# EAGLE board LJPCB_01 (EAGLE 8.0.2)
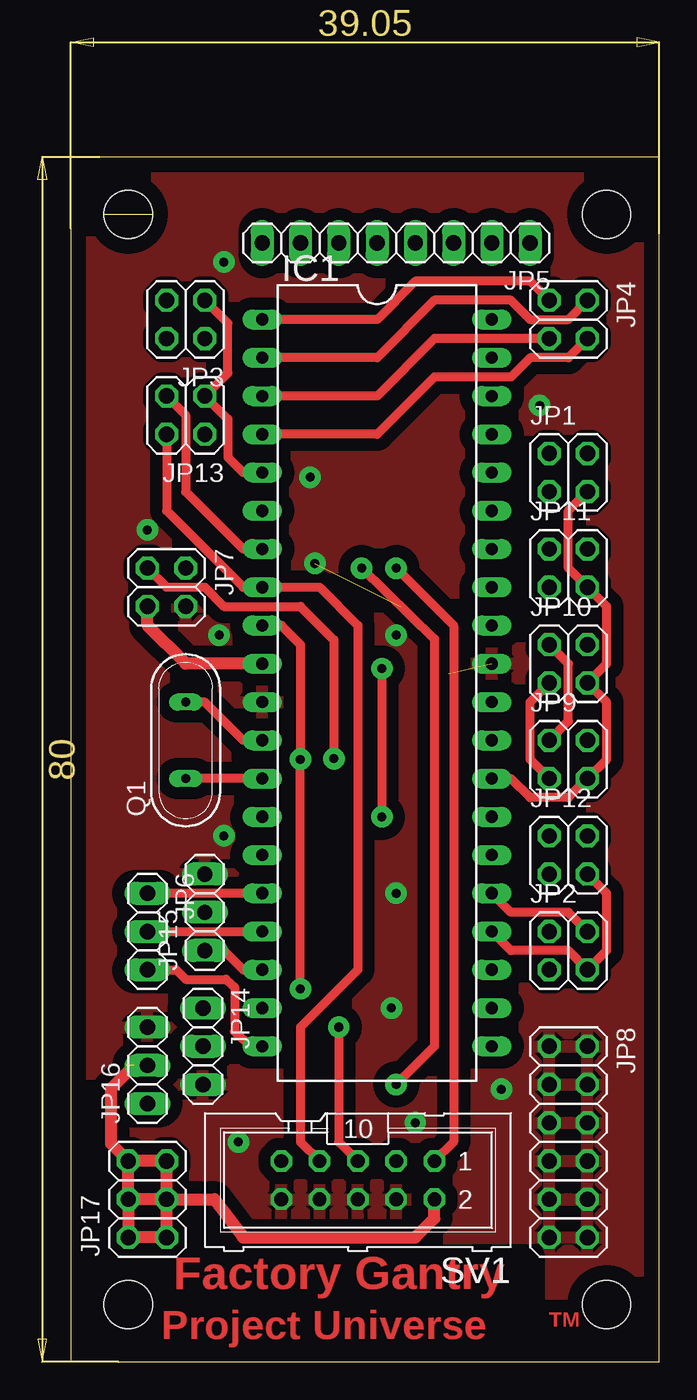
[diagram p0: board, top side]
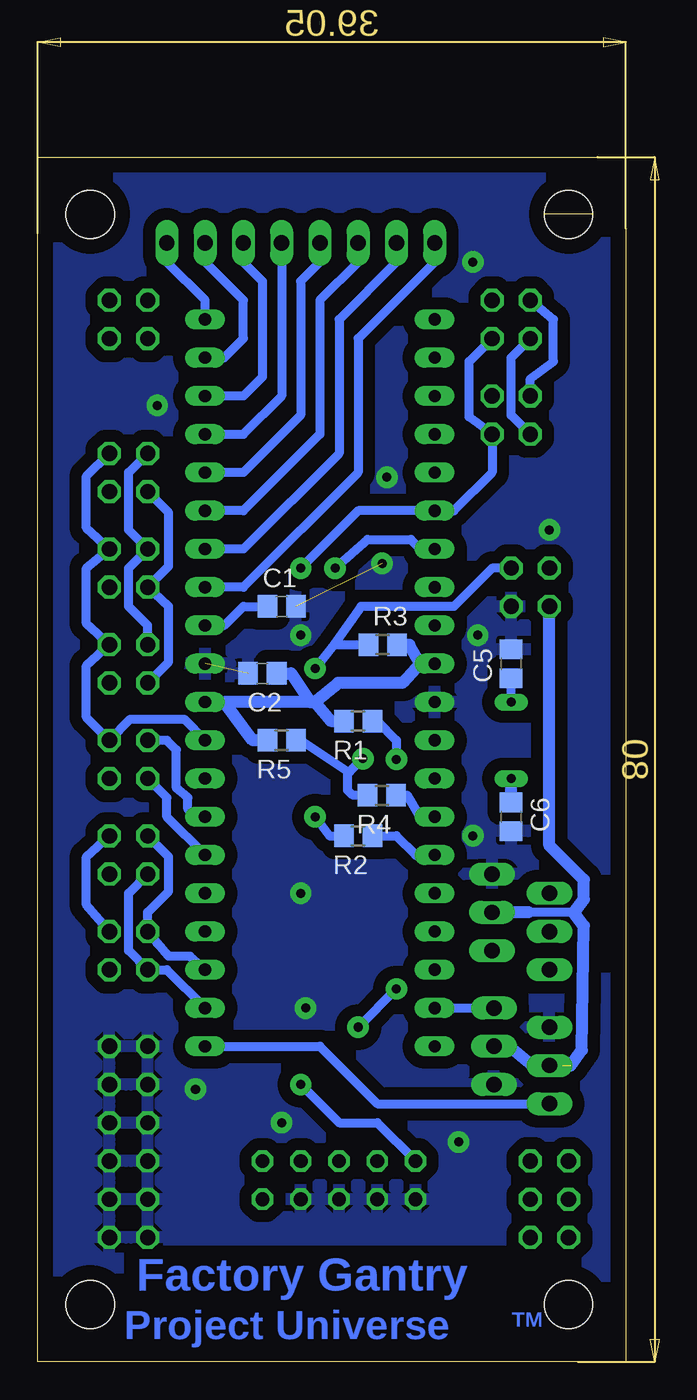
[diagram p1: board, bottom side, seen from below]

Size 39.04 x 80 mm. Coordinates in mm from the lower left corner, seen from the top.
Outline: 0,0 39.04,0 39.04,80 0,80 0,0
Copper layers (1*16): Top 0.035mm / dielectric 1.5mm / Bottom 0.035mm
Design rules "default *": minimum track width 0mil, minimum drill 0mil, track to track 8mil, track to pad 8mil, pad to pad 8mil, via to via 8mil, smd to smd 8mil, copper to edge 40mil, drill to drill 8mil, minimum pad ring 10mil, minimum via ring 8mil, stop-mask expansion 0mil, vias tented up to drill 0mil, thermal gap 10mil
Holes 3.2 mm at 3.81,76.2 35.56,76.2 3.81,3.81 35.56,3.81

## Footprints (pad centres in the part's own frame; a part is rotated, then mirrored left to right if it is on the bottom)
C0805 = smd 1.3 x 1.5: 1 -0.95,0; 2 0.95,0
DIL40 = drill 0.813 long: 1 -24.13,-7.62; 2 -21.59,-7.62; 3 -19.05,-7.62; 4 -16.51,-7.62; 5 -13.97,-7.62; 6 -11.43,-7.62; 7 -8.89,-7.62; 8 -6.35,-7.62; 9 -3.81,-7.62; 10 -1.27,-7.62; 11 1.27,-7.62; 12 3.81,-7.62; 13 6.35,-7.62; 14 8.89,-7.62; 15 11.43,-7.62; 16 13.97,-7.62; 17 16.51,-7.62; 18 19.05,-7.62; 19 21.59,-7.62; 20 24.13,-7.62; 21 24.13,7.62; 22 21.59,7.62; 23 19.05,7.62; 24 16.51,7.62; 25 13.97,7.62; 26 11.43,7.62; 27 8.89,7.62; 28 6.35,7.62; 29 3.81,7.62; 30 1.27,7.62; 31 -1.27,7.62; 32 -3.81,7.62; 33 -6.35,7.62; 34 -8.89,7.62; 35 -11.43,7.62; 36 -13.97,7.62; 37 -16.51,7.62; 38 -19.05,7.62; 39 -21.59,7.62; 40 -24.13,7.62
2X02 = drill 1.016 octagon: 1 -1.27,-1.27; 2 -1.27,1.27; 3 1.27,-1.27; 4 1.27,1.27
1X08 = drill 1.016 long: 1 -8.89,0; 2 -6.35,0; 3 -3.81,0; 4 -1.27,0; 5 1.27,0; 6 3.81,0; 7 6.35,0; 8 8.89,0
1X03 = drill 1.016 long: 1 -2.54,0; 2 0,0; 3 2.54,0
2X06 = drill 1.016 octagon: 1 -6.35,-1.27; 2 -6.35,1.27; 3 -3.81,-1.27; 4 -3.81,1.27; 5 -1.27,-1.27; 6 -1.27,1.27; 7 1.27,-1.27; 8 1.27,1.27; 9 3.81,-1.27; 10 3.81,1.27; 11 6.35,-1.27; 12 6.35,1.27
2X03 = drill 1.016 octagon: 1 -2.54,-1.27; 2 -2.54,1.27; 3 0,-1.27; 4 0,1.27; 5 2.54,-1.27; 6 2.54,1.27
QS = drill 0.61 long: 1 -2.54,0; 2 2.54,0
R0805 = smd 1.3 x 1.5: 1 -0.95,0; 2 0.95,0
ML10 = drill 0.914 octagon: 1 -5.08,-1.27; 2 -5.08,1.27; 3 -2.54,-1.27; 4 -2.54,1.27; 5 0,-1.27; 6 0,1.27; 7 2.54,-1.27; 8 2.54,1.27; 9 5.08,-1.27; 10 5.08,1.27

## Placement (x,y rotation side)
C1  100nF  [C0805]  22.86,50.16 0 bottom
C2  100nF  [C0805]  24.13,45.72 180 bottom
C5  22pF  [C0805]  7.62,46.36 90 bottom
C6  22pF  [C0805]  7.62,36.2 270 bottom
IC1  MEGA16-P  [DIL40]  20.32,45.09 270 top
JP1  [2X02]  33.02,59.05 0 top
JP2  [2X02]  33.02,27.3 0 top
JP3  [2X02]  7.62,69.22 180 top
JP4  [2X02]  33.02,69.22 270 top
JP5  [1X08]  21.59,74.3 180 top
JP6  [1X03]  5.08,28.57 270 top
JP7  [2X02]  6.35,51.44 270 top
JP8  [2X06]  33.02,14.61 270 top
JP9  [2X02]  33.02,40.01 0 top
JP10  [2X02]  33.02,46.36 0 top
JP11  [2X02]  33.02,52.71 0 top
JP12  [2X02]  33.02,33.66 0 top
JP13  [2X02]  7.62,62.87 180 top
JP14  [1X03]  8.76,20.95 270 top
JP15  [1X03]  8.89,29.84 90 top
JP16  [1X03]  5.08,19.68 90 top
JP17  [2X03]  5.08,10.79 90 top
Q1  [QS]  7.62,41.28 90 top
R1  10k  [R0805]  17.78,42.55 180 bottom
R2  220  [R0805]  17.78,34.92 180 bottom
R3  10k  [R0805]  16.15,47.62 0 bottom
R4  220  [R0805]  16.21,37.62 180 bottom
R5  10k  [R0805]  22.86,41.28 180 bottom
SV1  [ML10]  19.05,12.07 180 top

## Library data of the parts
C1 C2 C5 C6 R1-R5 = resistor
IC1 = atmel; MPN: ATMEGA16-16PU; OC_FARNELL: 9171142; OC_NEWARK: 01M6885
JP1-JP17 = pinhead
Q1 = special
SV1 = con-ml; OC_FARNELL: unknown; OC_NEWARK: unknown

## Nets
ADC0: IC1.40 JP5.1
ADC1: IC1.39 JP5.2
ADC2: IC1.38 JP5.3
ADC3: IC1.37 JP5.4
ADC4: IC1.36 JP5.5
ADC5: IC1.35 JP5.6
ADC6: IC1.34 JP5.7
ADC7: IC1.33 JP5.8
GND: C1.2 C2.2 C5.2 C6.2 IC1.11 IC1.31 JP7.4 JP8.1 JP8.2 JP8.3 JP8.4 JP8.5 JP8.6 JP8.7 JP8.8 JP8.9 JP8.10 JP8.11 JP8.12 JP14.3 JP15.3 JP16.3 SV1.4 SV1.6 SV1.8 SV1.10
ICP: IC1.20 JP6.3
INT0: IC1.16 JP6.1
INT1: IC1.17 JP6.2
M0A: IC1.1 JP4.1
M0B: IC1.2 JP4.2
M0C: IC1.3 JP4.3
M0D: IC1.4 JP4.4
M1A: IC1.5 JP3.1 JP13.1
M1B: IC1.6 JP3.2 JP13.2 SV1.1
M1C: IC1.7 JP3.3 JP13.3 SV1.9
M1D: IC1.8 JP3.4 JP13.4 SV1.7
M2A: IC1.22 JP2.1 JP12.1
M2B: IC1.23 JP2.2 JP12.2
M2C: IC1.24 JP2.3 JP12.3
M2D: IC1.25 JP2.4 JP12.4
M3A: IC1.26 JP1.1 JP9.1 JP10.1 JP11.1
M3B: IC1.27 JP1.2 JP9.2 JP10.2 JP11.2
M3C: IC1.28 JP1.3 JP9.3 JP10.3 JP11.3
M3D: IC1.29 JP1.4 JP9.4 JP10.4 JP11.4
N$1: JP7.1 R4.2 R5.1
N$2: JP7.2 R2.2 R3.1
N$3: C1.1 IC1.32
OC1A: IC1.19 JP14.1
OC1B: IC1.18 JP15.1
OC2: IC1.21 JP16.1
RST: IC1.9 R1.1 SV1.5
RXD: IC1.14 R4.1
TXD: IC1.15 R2.1
VCC: C2.1 IC1.10 IC1.30 JP7.3 JP14.2 JP15.2 JP16.2 JP17.1 JP17.2 JP17.3 JP17.4 JP17.5 JP17.6 R1.2 R3.2 R5.2 SV1.2
XTAL1: C6.1 IC1.13 Q1.1
XTAL2: C5.1 IC1.12 Q1.2

## Tracks (layer width: path | path; a pad name or v marks a point on that pad's centre or on a via)
ADC0
  Bottom 0.61: IC1.40 27.94,70.48 30.48,73.03 JP5.1
ADC1
  Bottom 0.61: JP5.2 27.94,73.03 25.4,70.48 25.4,67.95 26.67,66.67 IC1.39
ADC2
  Bottom 0.61: IC1.38 25.4,64.14 24.13,65.41 24.13,71.75 25.4,73.03 JP5.3
ADC3
  Bottom 0.61: IC1.37 25.4,61.59 22.86,64.14 JP5.4
ADC4
  Bottom 0.61: IC1.36 25.4,59.05 21.59,62.87 21.59,71.75 20.32,73.03 JP5.5
ADC5
  Bottom 0.61: JP5.6 17.78,73.03 20.32,70.48 20.32,61.59 25.4,56.52 IC1.35
ADC6
  Bottom 0.61: JP5.7 15.24,73.03 19.05,69.22 19.05,60.33 25.4,53.98 IC1.34
ADC7
  Bottom 0.61: JP5.8 12.7,73.03 17.78,67.95 17.78,59.05 25.4,51.44 IC1.33
GND  (via drill 0.6 pad 1.42)  (2 unrouted)
  other vias: 21.59,48.26 22.86,15.88 10.16,34.92 9.84,48.26 5.08,55.25 15.88,58.74 16.19,53.02 10.16,73.03 31.12,63.5 28.58,18.1 11.11,14.61 21.27,23.49 21.59,31.11
  pour Bottom (isolate 0.813): 0,80.01 38.73,80.01 38.73,0 0,0
  pour Top (isolate 0.813): 0.03,80.01 38.73,80.01 38.73,0 0.03,0
ICP
  Top 0.61: JP6.3 6.99,26.04 7.62,25.4 10.29,25.4 10.87,24.87 10.87,21.92 11.94,20.95 IC1.20
INT0
  Top 0.61: IC1.16 JP6.1
INT1
  Top 0.61: JP6.2 IC1.17
M0A
  Top 0.61: JP4.1 30.48,71.75 22.86,71.75 20.32,69.22 IC1.1
M0B
  Top 0.61: JP4.2 33.02,69.22 30.48,69.22 29.21,70.48 24.13,70.48 20.32,66.67 IC1.2
M0C
  Top 0.61: JP4.3 24.13,67.95 20.32,64.14 IC1.3
M0D
  Top 0.61: JP4.4 33.02,66.67 30.48,66.67 29.21,65.41 24.13,65.41 20.32,61.59 IC1.4
M1A
  Top 0.61: JP3.1 10.41,68.96 10.41,65.66 JP13.1 10.41,62.61 10.41,60.07 11.43,59.05 IC1.5
M1B  (via drill 0.6 pad 1.42)
  Top 0.61: v21.59,52.71 25.4,48.9 25.4,14.61 SV1.1
  Bottom 0.61: JP3.2 10.41,66.42 10.41,62.74 JP13.2 8.89,59.05 11.43,56.52 IC1.6 17.78,56.52 v21.59,52.71
M1C  (via drill 0.6 pad 1.42)
  Top 0.61: JP13.3 7.62,62.87 7.62,57.79 11.43,53.98 IC1.7 | v19.3,52.71 24.13,48.01 24.13,20.95 v21.59,18.41
  Bottom 0.61: JP13.3 6.35,65.28 4.83,66.42 4.83,69.22 JP3.3 | v19.3,52.71 17.14,54.61 14.29,54.61 13.65,53.98 IC1.7 | v21.59,18.41 19.05,15.88 16.51,15.88 SV1.9
M1D
  Top 0.61: JP13.4 6.35,56.52 11.43,51.44 IC1.8 16.51,51.44 19.05,48.9 19.05,26.04 15.24,22.22 15.24,14.61 SV1.7
  Bottom 0.61: JP13.4 7.62,62.87 7.62,66.67 JP3.4
M2A
  Bottom 0.61: IC1.22 30.48,26.04 JP2.1 33.02,27.3 33.02,31.11 JP12.1
M2B
  Bottom 0.61: IC1.23 28.96,26.92 30.35,26.92 31.12,27.81 JP2.2 31.75,29.84 30.35,31.24 30.35,33.53 JP12.2
M2C
  Top 0.61: IC1.24 29.21,27.3 33.02,27.3 JP2.3 35.56,27.3 35.56,31.11 JP12.3
M2D
  Top 0.61: JP2.4 33.02,29.84 29.21,29.84 IC1.25
  Bottom 0.61: JP2.4 35.81,30.35 35.81,33.53 JP12.4
M3A
  Top 0.61: JP9.1 30.48,40.01 30.48,43.82 JP10.1
  Bottom 0.61: IC1.26 30.48,36.2 30.48,37.47 JP9.1 | JP10.1 30.35,46.48 30.35,50.16 JP11.1 30.35,52.83 30.35,56.39 JP1.1
M3B
  Top 0.61: JP9.2 33.02,42.55 33.02,46.36 JP10.2
  Bottom 0.61: IC1.27 28.58,36.2 29.08,36.7 29.08,37.47 29.85,38.1 29.85,40.64 30.48,41.28 JP9.2 | JP10.2 31.75,48.9 33.02,50.16 33.02,52.71 JP11.2 33.02,55.25 33.02,59.05 JP1.2
M3C
  Top 0.61: JP1.3 33.02,56.52 33.02,52.71 JP11.3 35.56,50.16 35.56,46.36 JP10.3 35.56,43.82 35.56,40.01 JP9.3 33.02,37.47 30.48,37.47 29.21,38.73 IC1.28
M3D
  Bottom 0.61: JP1.4 35.81,58.8 35.81,55.37 JP11.4 35.81,52.71 35.81,49.02 JP10.4 35.81,46.23 35.81,42.8 JP9.4 32.89,42.67 29.34,42.67 IC1.29
N$1  (via drill 0.6 pad 1.42)
  Top 0.61: JP7.1 6.35,51.44 8.89,51.44 10.16,50.16 15.24,50.16 17.46,47.94 v17.46,40.06
  Bottom 0.61: R5.1 21.59,41.28 18.49,39.19 | 18.49,39.19 18.49,37.97 18.16,37.64 17.18,37.64 R4.2 | 18.49,39.19 18.33,39.19 v17.46,40.06
N$2  (via drill 0.6 pad 1.42)
  Top 0.61: v20.64,46.04 v20.64,36.2
  Bottom 0.61: JP7.2 8.89,52.71 11.43,50.16 17.58,50.16 19.36,47.64 | v20.64,36.2 19.69,34.92 R2.2 | 19.36,47.64 R3.1 | 19.36,47.64 v20.64,46.04
N$3
  Bottom 0.61: IC1.32 26.67,48.9 25.4,50.16 C1.1
OC1A
  Bottom 0.61: IC1.19 JP14.1
OC1B
  Top 0.61: JP15.1 10.16,27.3 11.43,26.04 IC1.18
OC2
  Bottom 0.61: IC1.21 20.32,20.95 16.51,17.14 JP16.1
RST  (via drill 0.6 pad 1.42)
  Top 0.61: IC1.9 13.97,48.9 15.24,47.62 v15.24,40.01 v15.24,24.76 | v17.78,22.22 17.78,14.61 SV1.5
  Bottom 0.61: v17.78,22.22 v15.24,24.76 | R1.1 16.51,42.55 15.24,41.28 v15.24,40.01
RXD
  Bottom 0.61: R4.1 14.53,37.62 13.69,36.22 12.72,36.22 IC1.14
TXD
  Bottom 0.61: R2.1 15.24,34.92 13.97,33.66 IC1.15
VCC  (1 unrouted)
  Top 0.813: IC1.10 7.62,46.36 5.08,48.9 JP7.3 | SV1.2 24.13,9.53 22.86,8.26 11.43,8.26 9.53,10.79 JP17.3 | JP17.4 JP17.2 JP17.1 JP17.3 | JP17.5 JP17.6 | JP17.6 2.67,14.48 2.67,18.16 4.19,19.68 JP16.2 | JP17.4 JP17.6 | JP17.3 JP17.5 | JP17.5 6.35,13.08 | JP17.3 JP17.4
  Bottom 0.61: 3.48,29.84 6.48,29.84
  Bottom 0.813: IC1.30 26.67,43.82 | C2.1 22.23,45.72 20.96,43.82 | R5.2 24.77,41.28 26.67,43.82 | 13.66,46.36 14.83,45.09 19.1,45.09 20.68,43.82 | 20.68,43.82 19.61,42.56 R1.2 | 20.68,43.82 20.96,43.82 | 20.96,43.82 26.67,43.82 | 13.66,46.36 IC1.10 | 13.66,46.36 14.38,47.61 R3.2 | JP7.3 5.08,34.29 2.79,32 2.79,30.73 3.48,29.84 2.79,28.96 2.92,20.7 3.68,19.68 6.22,19.68 7.75,20.95 JP14.2 | 6.48,29.84 JP15.2
XTAL1
  Top 0.61: IC1.13 Q1.1
  Bottom 0.813: C6.1 Q1.1
XTAL2
  Top 0.61: IC1.12 11.43,41.28 8.89,43.82 Q1.2
  Bottom 0.61: Q1.2 C5.1

## Text on the board
Top: Factory Gantry | Project Universe | TM
Bottom: Factory Gantry | TM | Project Universe